# Altium PCB PCB.PcbDoc
Units mil, origin at the board's own origin, x right, y up, seen from the top; angles counter-clockwise.
Board outline 858.27 x 3131.13 mil, 4 copper layers (Top Layer, GND, PWR, Bottom Layer), stack 29.356 mil thick; 71 components, 62 nets, 285 pads, 419 vias.
Unrouted connection lines stored in the file: 44.
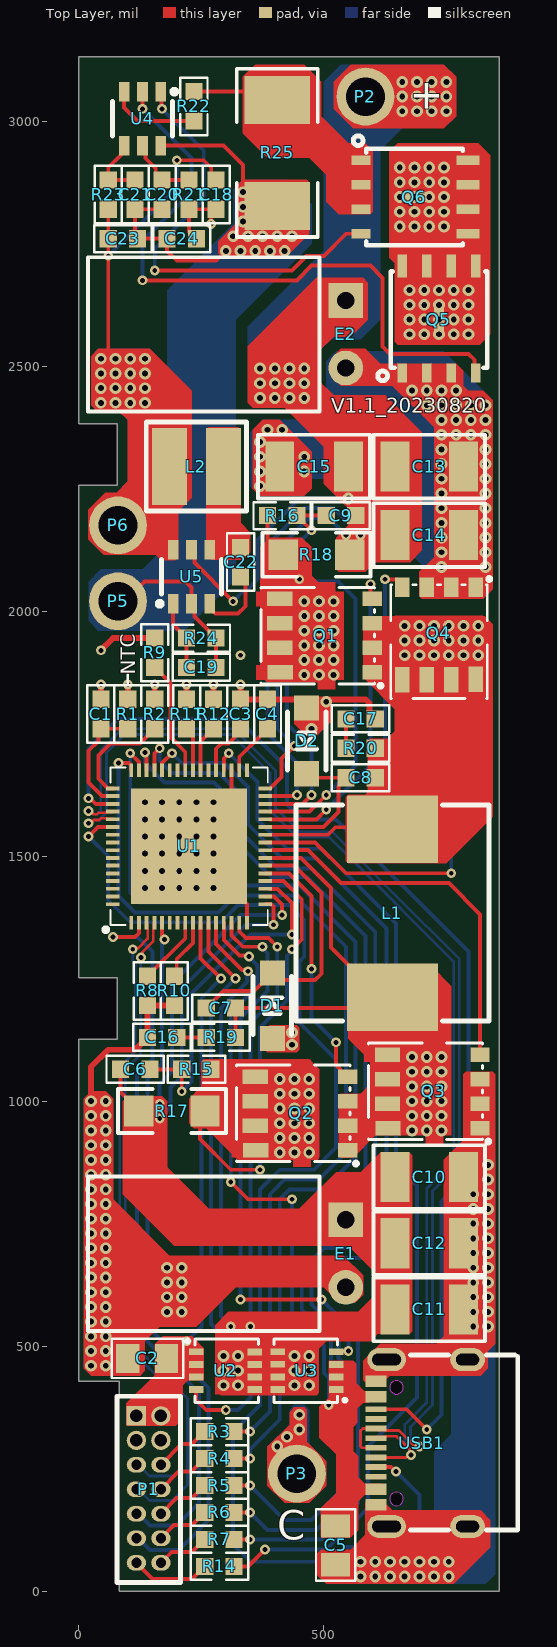
[diagram p0: Top Layer view]
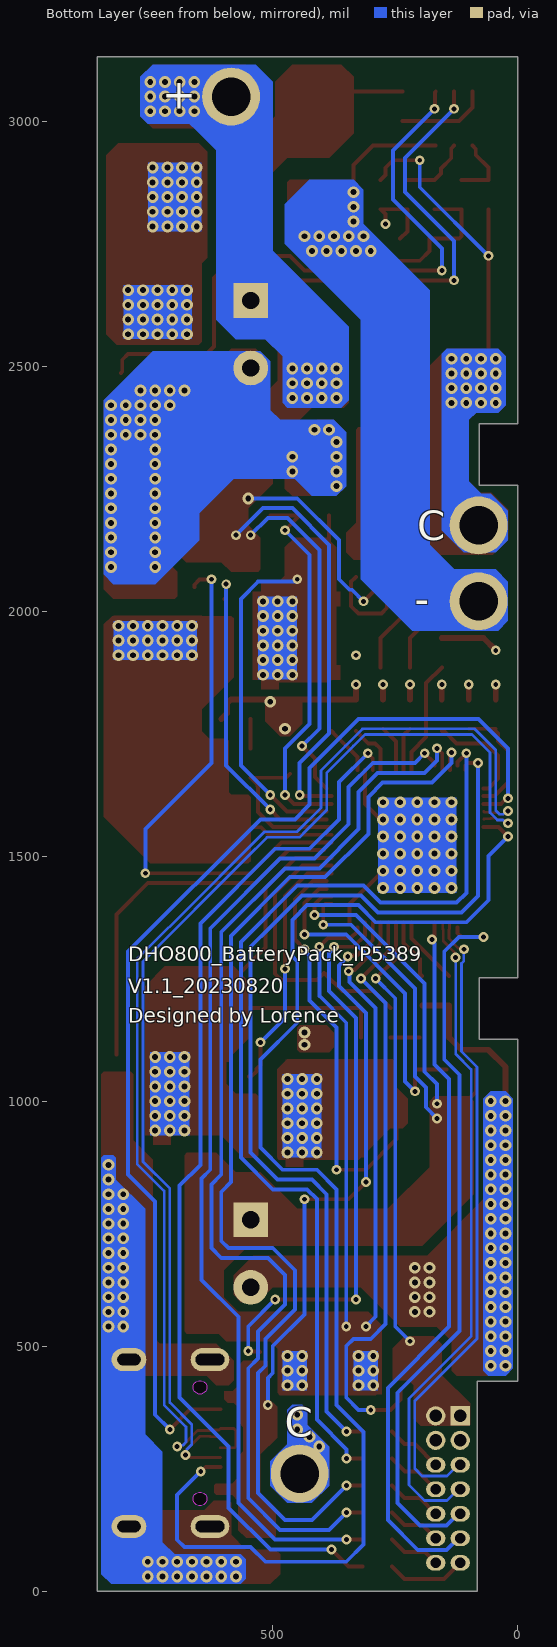
[diagram p1: Bottom Layer view, seen from below]
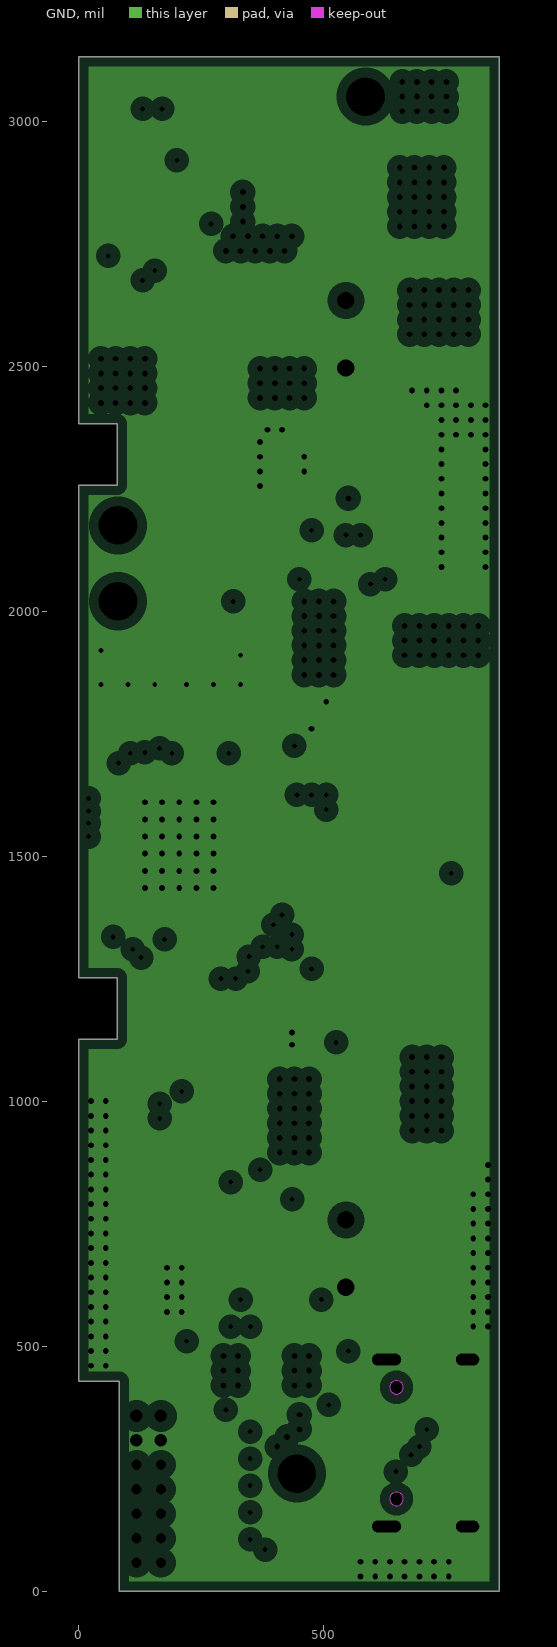
[diagram p2: GND, clearances drawn from the general rule]
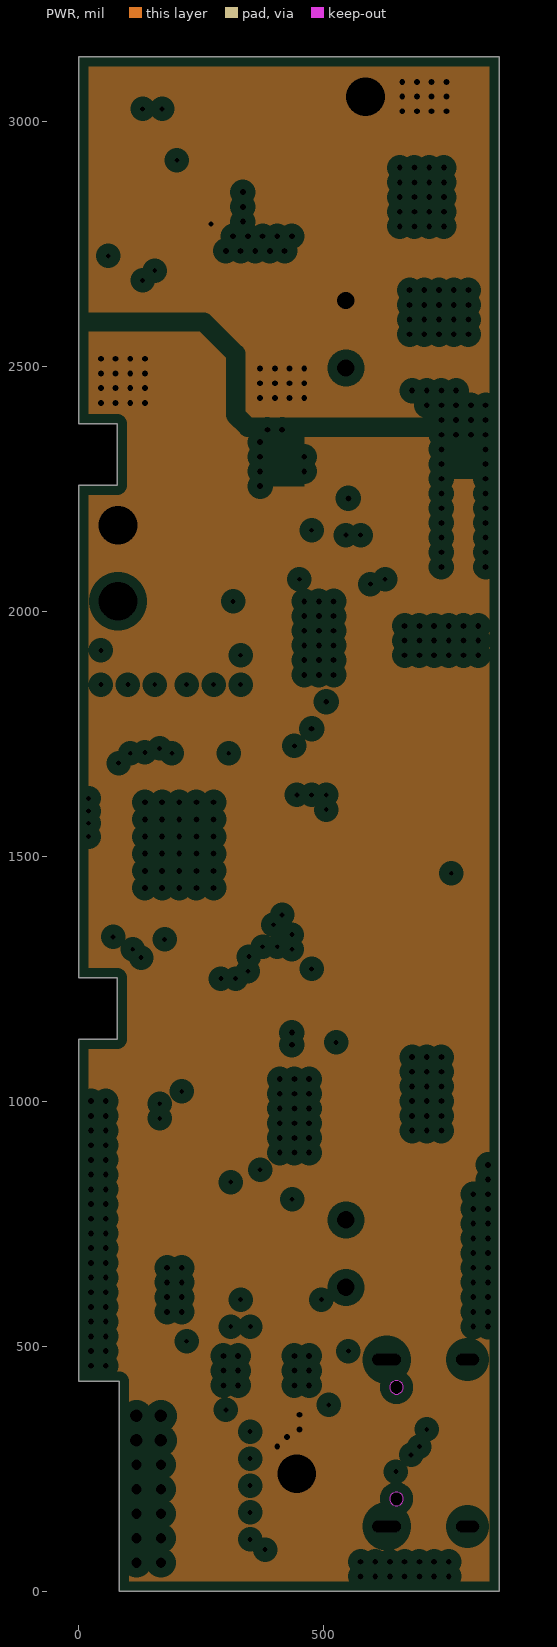
[diagram p3: PWR, clearances drawn from the general rule]

## Layer stack, top to bottom
Top Solder: solder mask 0.4, Solder Resist, Dk 3.5
Top Layer: signal copper 1.4
Dielectric 2: prepreg 2.8, PP-006, Dk 4.1
Dielectric 4: prepreg 2.8, PP-006, Dk 4.1
GND: plane copper 1.378, net GND
Dielectric 1: dielectric 12.6, FR-4, Dk 4.8
PWR: plane copper 1.378, net (Multiple Nets)
Dielectric 5: prepreg 2.8, PP-006, Dk 4.1
Dielectric 3: prepreg 2.8, PP-006, Dk 4.1
Bottom Layer: signal copper 1.4
Bottom Solder: solder mask 0.4, Solder Resist, Dk 3.5

## Board outline
0,428.33 0,1126 78.74,1126 78.74,1251.98 0,1251.98 0,2256.61 78.74,2256.61 78.74,2382.6 0,2382.6 0,3131.13 858.27,3131.13 858.27,0 82.72,0 82.72,428.33

## Design rules (kind name [scope] priority, off if disabled: settings)
Clearance [All] p1: gap=4 ignorepadtopadclearanceinfootprint=FALSE
ComponentClearance [All] p1: gap=0 collisioncheckmode=3 verticalgap=0 showdistances=FALSE
DiffPairsRouting [All] p1: maxlimit=6 minlimit=6 mostfreqgap=6 toplayer_minwidth=5.59 toplayer_maxwidth=5.59 toplayer_prefwidth=5.59 bottomlayer_minwidth=5.59 bottomlayer_maxwidth=5.59 bottomlayer_prefwidth=5.59 maxuncoupledlength=500
HoleSize [All] p1: absolutevalues=TRUE maxlimit=500 minlimit=1 maxpercent=80.000 minpercent=20.000
HoleToHoleClearance [All] p1: gap=0 allowstackedmicrovias=TRUE
MinimumSolderMaskSliver [All] p1: minsoldermaskwidth=0
PlaneClearance [All] p1: clearance=20
PlaneConnect [All] p1: planeconnectstyle=Direct reliefexpansion=20 reliefentries=4 reliefconductorwidth=10 reliefairgap=10
PolygonConnect [All] p1: connectstyle=Relief reliefconductorwidth=10 reliefentries=4 polygonreliefangle="90 Angle" airgapwidth=10
RoutingVias [All] p1: holewidth=10 width=20 viastyle="Through Hole" minholewidth=10 minwidth=20 maxholewidth=500 maxwidth=500
SilkToSilkClearance [All] p1: silktosilkclearance=0
SilkToSolderMaskClearance [IsPad] p1: minsilkscreentomaskgap=0 clearancetoexposedcopper=TRUE
SolderMaskExpansion [All] p1: expansion=4 istentingtop=FALSE
Width [All] p1: maxlimit=500 minlimit=8 preferedwidth=10
21 further rules are at their usual default settings.

## Classes and differential pairs
differential pair CUSB: +CUSB_P -CUSB_N
differential pair BUSB: +BUSB_P -BUSB_N

## Components (designator, comment, footprint, x,y, rotation, side; value= is the part's Value field where it differs from the comment)
C1 "100nF" C_0603 45,1790 r90 top
C2 "10uF" C_0805 140,475 r0 top
C3 "2.2uF" C_0603 330,1790 r90 top
C4 "2.2uF" C_0603 385,1790 r90 top
C5 "10uF" C_0805 524,94 r90 top
C6 "1uF" C_0603 115,1065 r0 top
C7 "100nF" C_0603 290,1190 r180 top
C8 "100nF" C_0603 575,1660 r180 top
C9 "1uF" C_0603 535,2195 r0 top
C10 "22uF" C_1210 715,845 r180 top
C11 "22uF" C_1210 715,575 r180 top
C12 "22uF" C_1210 715,710 r180 top
C13 "22uF" C_1210 715,2295 r180 top
C14 "22uF" C_1210 715,2155 r180 top
C15 "22uF" C_1210 480,2295 r0 top
C16 "2.2nF" C_0603 170,1130 r0 top
C17 "2.2nF" C_0603 575,1780 r180 top
C18 "10uF" C_0603 280,2850 r270 top
C19 "1nF" C_0603 250,1885 r180 top
C20 "100nF" C_0603 170,2850 r90 top
C21 "100nF" C_0603 115,2850 r90 top
C22 "10nF" C_0603 330,2100 r90 top
C23 "10uF" C_0603 90,2760 r180 top
C24 "22uF" C_0603 210,2760 r0 top
D1 "SMF30A" SOD-123FL_L2.6-W1.6-LS3.4-R-FD 395,1195 r90 top
D2 "SMF30A" SOD-123FL_L2.6-W1.6-LS3.4-R-FD 465,1735 r270 top
E1 "220uF/35V/8*12mm" "CAP 3.5*8*12_L" 545,688.9 r270 top locked
E2 "220uF/35V/8*12mm" "CAP 3.5*8*12_L" 545,2565 r270 top locked
L1 "10uH" IND-SMD_L11.0-W10.2 640,1383.74 r90 top locked
L2 "2.2uH" L_4*4 240,2300 r180 top
P1 "X1321WR-2x07J-C40D18" HDR-TH_14P-P1.27-H-M-R2-C7-S1.27-W7.5-N2 142.45,207.85 r270 top locked
P2 "1PIN" 1PIN 585,3050 r0 top locked
P3 "1PIN" 1PIN 445,240 r0 top locked
P5 "1PIN" 1PIN 80,2020 r0 top locked
P6 "1PIN" 1PIN 80,2175 r0 top locked
Q1 "5C670" DFN-5_L6.1-W5.1-P1.27-BL 525,1950 r90 top
Q2 "5C670" DFN-5_L6.1-W5.1-P1.27-BL 475,975 r90 top
Q3 "5C670" DFN-5_L6.1-W5.1-P1.27-BL 745,1020 r90 top
Q4 "5C670" DFN-5_L6.1-W5.1-P1.27-BL 735,1975 r180 top
Q5 "TPH1R403NL" DSOP-8_L5.0-W5.0-P1.27-LS6.0-BL-EP 735,2595 r0 top
Q6 "TPH1R403NL" DSOP-8_L5.0-W5.0-P1.27-LS6.0-BL-EP 685,2845 r270 top locked
R1 "10K" R_0603 100,1790 r90 top
R2 "13K" R_0603 155,1790 r90 top
R3 "100R" R_0603 286.88,325.66 r180 top
R4 "100R" R_0603 286.88,270.66 r180 top
R5 "100R" R_0603 286.88,215.66 r180 top
R6 "100R" R_0603 286.88,160.66 r180 top
R7 "100R" R_0603 286.88,105.66 r180 top
R8 "0R" R_0603 140,1225 r90 top
R9 "27K" R_0603 155,1915 r90 top
R10 "0R" R_0603 195,1225 r90 top
R11 "6.2K" R_0603 220,1790 r90 top
R12 "27K" R_0603 275,1790 r90 top
R14 "10K" R_0603 286.88,50.66 r180 top
R15 "10R" R_0603 240,1065 r180 top
R16 "10R" R_0603 415,2195 r0 top
R17 "0.005R" R_1206 190.07,979.77 r0 top
R18 "0.005R" R_1206 485,2115 r0 top
R19 "2R" R_0603 290,1130 r0 top
R20 "2R" R_0603 575,1720 r0 top
R21 "330R" R_0603 225,2850 r270 top
R22 "2K" R_0603 235,3030 r270 top
R23 "330R" R_0603 60,2850 r270 top
R24 "33K" R_0603 250,1945 r180 top
R25 "0.005R" R_2512 405,2935 r270 top
U1 "IP5389_BZ_AACC" QFN-64_IP5389 225,1520 r0 top locked
U2 "WSD3066DN33" DFN-8_L3.3-W3.3-P0.65-BL 270,450 r270 top locked
U3 "WSD3066DN33" DFN-8_L3.3-W3.3-P0.65-BL 495,450 r90 top
U4 "HY2120-LB" SOT-23-6_L2.9-W1.6-P0.95-LS2.8-BR 130,3005 r90 top locked
U5 "ETA3000S2G" SOT-23-6_L2.9-W1.6-P0.95-LS2.8-BL 230,2070 r0 top
USB1 "TYPE-C 16PIN 2MD(073)" USB-C-SMD_TYPE-C-6PIN-2MD-073 699.88,302.34 r90 top locked

## Footprints (in the part's own frame and the unit in brackets; to place one, negate y for a bottom-side part, rotate by r counter-clockwise, add the part's x,y. Pads: shape width x height; smd on the part's side, far side on the other; paste and mask are expansions set on the pad)
1PIN [mm] "焊点"
  round 3 hole 2 paste+0 mask+0.051: 1(0,0)
C_0603 [mil]
  rect 35x35 smd: 1(-30,0) 2(30,0)
  silkscreen extent -59,-28 59,28
C_0805 [mm]
  rect 1.2x1.5 smd: 1(-1.016,0) 2(0.984,0)
  silkscreen extent -1.85,-1.02 1.85,1.02
C_1210 [mm]
  rect 1.5x2.6 smd: 1(-1.778,0) 2(1.778,0)
  silkscreen extent -2.9,-1.65 2.9,1.65
"CAP 3.5*8*12_L" [mm] "脚距3.5mm直径8mm高度11.5mm"
  rect 1.8x1.8 hole 0.9: 1(-1.75,0)
  round 1.8 hole 0.9: 2(1.75,0)
  silkscreen extent -3.99,-13.37 4.01,-1.37
DFN-5_L6.1-W5.1-P1.27-BL [mm]
  rect 0.75x1 smd: 1(-1.905,-1.875) 2(-0.635,-1.875) 3(0.635,-1.875) 4(1.905,-1.875)
  rect 0.749x1.3 smd paste-100 mask+0.051: 5(1.905,2.921) 6(0.635,2.921) 7(-0.635,2.921) 8(-1.905,2.896)
  Top Layer region: -2.28,-0.39 -2.28,0.035 -2.775,0.035 -2.775,0.94 -2.28,0.94 -2.28,4.14 -1.53,4.14 -1.53,3.64 1.53,3.64 1.53,4.14 2.28,4.14 2.28,0.94 2.775,0.94 2.775,0.035 2.28,0.035 2.28,-0.39 -2.28,-0.39
  silkscreen extent -2.7,-2.4 2.5,3.9
DFN-8_L3.3-W3.3-P0.65-BL [mm]
  rect 0.35x0.75 smd paste+0 mask+0.05: 1(-0.975,-0.78) 2(-0.325,-0.78) 3(0.325,-0.78) 4(0.975,-0.78) 5(0.977,2.272) 6(0.327,2.272) 7(-0.323,2.272) 8(-0.973,2.272)
  Top Layer region: -1.222,0.201 -1.222,2.129 -1.174,2.129 -1.174,2.73 -0.773,2.73 -0.773,2.129 -0.524,2.129 -0.524,2.73 -0.123,2.73 -0.123,2.129 0.126,2.129 0.126,2.73 0.528,2.73 0.528,2.129 0.777,2.129 0.777,2.73 0.777,2.129 0.777,2.73 1.178,2.73 1.178,2.129 1.226,2.129 1.226,0.201 -1.222,0.201
  silkscreen extent -1.65,-1.27 1.65,2.46
DSOP-8_L5.0-W5.0-P1.27-LS6.0-BL-EP [mm]
  rect 0.5x1 smd paste-100 mask+0.05: 1(-1.906,-2.77) 2(-0.636,-2.77) 3(0.634,-2.77) 4(1.904,-2.77)
  rect 0.5x1.2 smd paste-100 mask+0.05: 5(1.906,2.77) 6(0.636,2.77) 7(-0.634,2.77) 8(-1.904,2.77) 9(0,0)
  Top Layer region: -2.125,2.2 2.125,2.2 2.125,-1.3 -2.125,-1.3 -2.125,2.2
  silkscreen extent -3.17,-3.17 2.5,2.5
HDR-TH_14P-P1.27-H-M-R2-C7-S1.27-W7.5-N2 [mm]
  rect 1x1 hole 0.65: 1(-3.81,-0.635)
  round 1 hole 0.65: 2(-3.81,0.635) 3(-2.54,-0.635) 4(-2.54,0.635)
  oval 0.8x1 hole 0.53: 5(-1.27,-0.635) 6(-1.27,0.635) 7(0,-0.635) 8(0,0.635) 9(1.27,-0.635) 10(1.27,0.635) 11(2.54,-0.635) 12(2.54,0.635) 13(3.81,-0.635) 14(3.81,0.635)
  silkscreen extent -4.83,-1.65 4.83,1.65
IND-SMD_L11.0-W10.2 [mm]
  rect 3.5x4.7 smd: 1(-4.35,0) 2(4.35,0)
  silkscreen extent -5.6,-5 5.6,5
L_4*4 [mm]
  rect 1.8x4 smd: 1(-1.4,0.127) 2(1.4,0.127)
  silkscreen extent -2.6,-2.17 2.6,2.43
QFN-64_IP5389 [mm]
  rect 0.2x0.7 smd paste+0 mask+0.051: 1(-3,-3.95) 2(-2.6,-3.95) 3(-2.2,-3.95) 4(-1.8,-3.95) 5(-1.4,-3.95) 6(-1,-3.95) 7(-0.6,-3.95) 8(-0.2,-3.95) 9(0.2,-3.95) 10(0.6,-3.95) 11(1,-3.95) 12(1.4,-3.95) 13(1.8,-3.95) 14(2.2,-3.95) 15(2.6,-3.95) 16(3,-3.95) 33(3,3.95) 34(2.6,3.95) 35(2.2,3.95) 36(1.8,3.95) 37(1.4,3.95) 38(1,3.95) 39(0.6,3.95) 40(0.2,3.95) 41(-0.2,3.95) 42(-0.6,3.95) 43(-1,3.95) 44(-1.4,3.95) 45(-1.8,3.95) 46(-2.2,3.95) 47(-2.6,3.95) 48(-3,3.95)
  rect 0.7x0.2 smd paste+0 mask+0.051: 17(3.95,-3) 18(3.95,-2.6) 19(3.95,-2.2) 20(3.95,-1.8) 21(3.95,-1.4) 22(3.95,-1) 23(3.95,-0.6) 24(3.95,-0.2) 25(3.95,0.2) 26(3.95,0.6) 27(3.95,1) 28(3.95,1.4) 29(3.95,1.8) 30(3.95,2.2) 31(3.95,2.6) 32(3.95,3) 49(-3.95,3) 50(-3.95,2.6) 51(-3.95,2.2) 52(-3.95,1.8) 53(-3.95,1.4) 54(-3.95,1) 55(-3.95,0.6) 56(-3.95,0.2) 57(-3.95,-0.2) 58(-3.95,-0.6) 59(-3.95,-1) 60(-3.95,-1.4) 61(-3.95,-1.8) 62(-3.95,-2.2) 63(-3.95,-2.6) 64(-3.95,-3)
  rect 6x6 smd paste+0 mask+0.051: 65(0,0)
  silkscreen extent -4.39,-4.39 4.08,4.08
R_0603 [mil]
  rect 35x35 smd: 1(-30,0) 2(30,0)
  silkscreen extent -59,-28 59,28
R_1206 [mil]
  rect 60x62.99 smd: 1(-67.5,0) 2(67.5,0)
  silkscreen extent -110,-45 110,45
R_2512 [mm]
  rect 2.5x3.4 smd: 1(-2.75,0) 2(2.75,0)
  silkscreen extent -4.36,-2.1 4.36,2.1
SOD-123FL_L2.6-W1.6-LS3.4-R-FD [mm]
  rect 1.3x1.3 smd paste+0 mask+0.051: 1(1.7,0) 2(-1.7,0)
  silkscreen extent -1.5,-1 1.5,1
SOT-23-6_L2.9-W1.6-P0.95-LS2.8-BL [mm]
  rect 0.55x1 smd paste+0 mask+0.102: 1(-0.95,-1.4) 2(0,-1.4) 3(0.95,-1.4) 4(0.95,1.4) 5(0,1.4) 6(-0.95,1.4)
  silkscreen extent -1.78,-1.52 1.55,0.9
SOT-23-6_L2.9-W1.6-P0.95-LS2.8-BR [mm]
  rect 1x0.55 smd paste+0 mask+0.051: 1(1.4,-0.95) 2(1.4,0) 3(1.4,0.95) 4(-1.4,0.95) 5(-1.4,0) 6(-1.4,-0.95)
  silkscreen extent -0.9,-1.78 1.52,1.55
USB-C-SMD_TYPE-C-6PIN-2MD-073 [mm]
  rect 0.6x1.1 smd paste-100 mask+0.05: 1(-3.2,2.375) 2(-2.4,2.375) 11(2.4,2.375) 12(3.2,2.375)
  rect 0.3x1.1 smd paste-100 mask+0.05: 3(-1.75,2.375) 4(-1.25,2.375) 5(-0.75,2.375) 6(-0.25,2.375) 7(0.25,2.375) 8(0.75,2.375) 9(1.25,2.375) 10(1.75,2.375)
  oval 1.2x1.8 hole 0.6 slot 1.2 at 90 deg paste+0 mask+0.05: 13(-4.325,-2.375) 14(4.325,-2.375)
  oval 1.2x2 hole 0.6 slot 1.5 at 90 deg paste+0 mask+0.05: 13(-4.325,1.825) 14(4.325,1.825)
  Keep-Out Layer board cut-out: 3.24,1.305 3.24,1.375 3.187,1.503 3.088,1.602 2.96,1.655 2.821,1.655 2.692,1.602 2.593,1.503 2.54,1.375 2.54,1.305 2.54,1.235 2.593,1.107 2.692,1.008 2.821,0.955 2.96,0.955 3.088,1.008 3.187,1.107 3.24,1.235 3.24,1.305 3.24,1.305
  Keep-Out Layer board cut-out: -2.54,1.305 -2.54,1.375 -2.593,1.503 -2.692,1.602 -2.82,1.655 -2.96,1.655 -3.088,1.602 -3.187,1.503 -3.24,1.375 -3.24,1.305 -3.24,1.235 -3.187,1.107 -3.088,1.008 -2.96,0.955 -2.82,0.955 -2.692,1.008 -2.593,1.107 -2.54,1.235 -2.54,1.305 -2.54,1.305
  silkscreen extent -4.5,-4.97 4.57,0.6

## Part data
C1 C3 C4 C6 C7 C8 C9 C16 C17 C18 C19 C20 C21 C22 C23 C24: library part C_0603, "贴片电容"
C2 C5: library part C_0805, "贴片电容"
C10 C11 C12 C13 C14 C15: library part C_1210, "贴片电容"
D1 D2: library part SMF30A_C364281, JLCPCB Part Class="Extended Part", Manufacturer="(MDD) Jiangsu Yutai Elec", Contributor=LCSC, Manufacturer Part=SMF30A, spicePre=D, spiceSymbolName=SMF30A_C364281, Supplier=LCSC, Supplier Part=C364281
E1 E2: library part C-CS, "直插固态电容", BOM名称=直插固态电容, 学习资源=www.ooocke.com, 版权归属=源创客
L1: library part 5.6uH, "PSPMAA1040H-100M-ANP", JLCPCB Part Class="Extended Part", Manufacturer=Sunlord, Manufacturer Part=MWSA1206S-5R6MT, Contributor=LCSC, nameAlias=Inductance, spicePre=L, spiceSymbolName=MWSA1206S-5R6MT, Supplier=LCSC, Supplier Part=C408522
L2: JLCPCB Part Class="Extended Part", Manufacturer=EMTEK, Manufacturer Part=PHC0420-2R2M-T, Contributor=LCSC, nameAlias=Inductance, spicePre=L, spiceSymbolName=PHC0420-2R2M-T, Supplier=LCSC, Supplier Part=C251688
P1: "插针", Current Rating (Max)=1A, JLCPCB Part Class="Extended Part", LCSC Part Name="1.27mm 2x7P 弯插 方针", Manufacturer="XKB Connectivity(中国星坤)", Operating Temperature Range=-40℃~+105℃, Voltage Rating (Max)=250V, Welding Temperature (Max)=260℃, Add into BOM=yes, Circluar Pins/Square Pins=方针, Contact Material=黄铜, Contact Plating=金, Convert to PCB=yes, Device=X1321WR-2x07J-C40D18, Insulation Height=1mm, Length of End Connection Pin=-, Length of Mating Pin=4mm, Manufacturer Part=X1321WR-2x07J-C40D18, Mounting Type=弯插, Name=X1321WR-2x07J-C40D18, Number of Pins=14, Number of Rows=2, Pin Structure=2x7P, Pitch=1.27mm, Row Spacing=1.27mm, Supplier=LCSC, Supplier Footprint=插件,P=1.27mm, Supplier Part=C2881827, Symbol=X1321WR-2X07J-C40D18
P2 P3 P5 P6: "焊点", JLCPCB Part Class="Extended Part", Manufacturer=ZHENGLING, Manufacturer Part=Z-211-0311-0021-001, Contributor=LCSC, spicePre=H, spiceSymbolName=Z-211-0311-0021-001, Supplier=LCSC, Supplier Part=C152153
Q1 Q2 Q3 Q4: "NTMFS5C670NLT1G", JLCPCB Part Class="Extended Part", Manufacturer="ON Semicon", Contributor=LCSC, Manufacturer Part=NTMFS5C670NLT1G, spicePre=Q, spiceSymbolName=BSC059N04LS6, Supplier=LCSC, Supplier Part=C179626
Q5 Q6: library part SIRA12DP-T1-GE3, JLCPCB Part Class="Extended Part", Manufacturer="Vishay Intertech", Contributor=LCSC, Manufacturer Part=SIRA12DP-T1-GE3, spicePre=Q, spiceSymbolName=SIRA12DP-T1-GE3, Supplier=LCSC, Supplier Part=C241863
R1 R2 R3 R4 R5 R6 R7 R8 R9 R10 R11 R12 R14 R15 R16 R19 R20 R21 R22 R23 R24: library part R_0603, "贴片电阻"
R17 R18: library part R_1206, "贴片电阻"
R25: library part R_2512, "贴片电阻"
U1: "芯片", Contributor=LoveLoli, spicePre=U, spiceSymbolName=IP5389
U2 U3: "NMOS管", JLCPCB Part Class="Extended Part", Manufacturer="ON Semicon", Manufacturer Part=NTMFS5C670NLT1G, Contributor=LCSC, spicePre=Q, spiceSymbolName=BSC059N04LS6, Supplier=LCSC, Supplier Part=C179626
U4: JLCPCB Part Class="Extended Part", Manufacturer=HYCON, Contributor=LCSC, Manufacturer Part=HY2120-LB, spicePre=U, spiceSymbolName=HY2120-LB, Supplier=LCSC, Supplier Part=C168778
U5: "芯片", LCSC Assembly=Yes, Manufacturer=ETA(钰泰), Contributor=ryq1212, Manufacturer Part=ETA3000S2G, SMT Type=Extend, spicePre=U, spiceSymbolName=ETA3000S2G
USB1: "USB C母座", Current Rating - Power (Max)=5A, JLCPCB Part Class="Extended Part", LCSC Part Name="TYPE-C母座 16P 4脚插件带定位柱 不锈钢外壳 2次模顶", Manufacturer="SHOU HAN(首韩)", Operating Temperature Range=-25℃~+85℃, Add into BOM=yes, Connector Type=Type-C, Convert to PCB=yes, Device="TYPE-C 16PIN 2MD(073)", Gender=母座, Manufacturer Part="TYPE-C 16PIN 2MD(073)", Mounting Style=卧贴, Name="TYPE-C 16PIN 2MD(073)", Number of Contacts=16, Number of Ports=1, Standard=-, Supplier=LCSC, Supplier Footprint=SMD, Supplier Part=C2765186, Symbol="TYPE-C 16PIN 2MD(073)"

## Via types
v1: diameter 24, hole 12, Top Layer to Bottom Layer, tented both sides, 341 vias
v2: diameter 20, hole 10, Top Layer to Bottom Layer, tented both sides, 78 vias

## Nets (pads, with @x,y where several pads share a name; then routed paths per layer and width w, separated by ;. In a path a pad name is that pad's centre, name@x,y a point inside that pad or via, vN(x,y) a via of type N, cw(c..) or ccw(c..) an arc to the next point about the centre after c; other vN are vias at no path point)
BAT+: C9.2 C13.2 C14.2 C15.2 C18.2 C24.2 E2.1 P2.1 R18.2 R21.2 U1.31 U1.32 U5.5 | length 2260.4
  Top Layer w8: U5.5 235.68,2119.44 235.68,2099.32 v2(315,2020) ; C24.2 225,2775 R21.2 C18.2 270,2810 v2(270,2790) ; U1.31 439.11,1622.36 441.75,1625 v2(445,1625) ; U1.32@390.29,1638.17 414,1661.88 414,1699 v2(440,1725) ; v2(545,2155) 545,2158.25 553,2166.25 553,2183 C9.2
  Bottom Layer w8: v2(315,2020) 338.65,2043.65 343.65,2043.65 365,2065 365,2145 450,2230 v1(550,2230) ; v2(440,1725) 405,1760 405,2125 470,2190 510,2190 v2(545,2155) ; v2(445,1625) 445,1690 385,1750 385,2135 460,2210 520,2210 v2(575,2155)
  other v1: 370,2435 400,2435 430,2435 460,2435 370,2465 400,2465 430,2465 460,2465 370,2495 400,2495 430,2495 460,2495 660,3020 690,3020 720,3020 750,3020 660,3050 690,3050 720,3050 750,3050 660,3080 690,3080 720,3080 750,3080
BAT-: C19.1 C20.1 C21.1 C23.1 C24.1 P5.1 R24.1 R25.2 U4.6 U5.2 | length 933
  Top Layer w8: P5.1 93.86,2020 133.86,2060 218,2060 230,2048 U5.2 235.8,2009.08 235.8,1989.2 R24.1 C19.1 ; U4.6 295.12,2949.88 335,2910 v1(335,2855) ; C20.1 C21.1 115,2765 C23.1 C24.1 180,2735 200,2715 280,2715 v1(300,2735)
  other v1: 330,2735 360,2735 390,2735 420,2735 315,2765 345,2765 375,2765 405,2765 435,2765 335,2795 335,2825
BATC: C18.1 C23.2 L2.2 P3.1 P6.1 R23.2 U5.6 | length 1075.9
  Top Layer w8: R23.2 C23.2 v2(60,2725) 60,2471.72 75,2456.72 v1(75,2455) v1(105,2425) 108.06,2421.94 108.06,2415.13 184.88,2338.31 L2.2 ; U5.6 192.6,2262.72 L2.2@194.88,2265 ; v2(200,2920) 255,2920 270.19,2904.81 270.19,2889.81 C18.1
  Bottom Layer w8: v2(60,2725) 200,2865 v2(200,2920)
  other v1: 405,295 425,315 450,330 450,360 45,2425 75,2425 135,2425 45,2455 105,2455 135,2455 45,2485 75,2485 105,2485 135,2485 45,2515 75,2515 105,2515 135,2515
BUSB_N: P1.7 U1.4 | length 1351.7
  Top Layer w5.59: v2(126.97,1293.03) 129.73,1295.79 129.73,1304.56 152.06,1326.89 152.06,1350.28 152.99,1351.22 152.99,1363.35 U1.4
  Bottom Layer w5.59: P1.7 121.39,207.85 144.24,185 190,185 221.78,216.78 221.78,393.22 95,520 95,1065 126.59,1096.59 126.59,1292.65 v2(126.97,1293.03)
BUSB_P: P1.5 U1.3 | length 1309.1
  Top Layer w5.59: v2(110,1310) 112.76,1312.76 121.53,1312.76 140.47,1331.69 140.47,1350.28 139.53,1351.22 139.53,1363.35 U1.3
  Bottom Layer w5.59: v2(110,1310) 110,1286.25 115,1281.25 115,1101.39 83.41,1069.8 83.41,515.2 210.19,388.42 210.19,250.19 195,235 144.24,235 121.39,257.85 P1.5
CC1: U1.54 USB1.4 | length 2704.3
  Top Layer w8: v2(20,1540) 39.37,1559.37 U1.54 ; USB1.4 606.44,253.07 636.77,253.07 645.84,244 v2(647,244)
  Bottom Layer w8: v2(20,1540) 60,1500 60,1410 105,1365 290,1365 325,1400 430,1400 460,1370 460,1295 450,1285 450,1160 525,1085 525,905 480,860 410,860 370,820 370,380 315,325 315,95 350,60 515,60 545,90 680,90 695,105 695,196 v2(647,244)
CC2: U1.51 USB1.10 | length 2327.7
  Top Layer w8: v2(20,1618) 23.25,1618 34.63,1606.61 U1.51 ; USB1.10 668.75,371.25 v2(710,330)
  Bottom Layer w8: v2(20,1618) 20,1720 80,1780 325,1780 425,1680 425,1605 455,1575 525,1575 795,1305 795,850 740,795 740,360 v2(710,330)
CC3: P1.9 U1.2 | length 1506.9
  Top Layer w8: v2(70,1335) 115,1335 122.57,1342.57 U1.2@122.57,1354.71
  Bottom Layer w8: v2(70,1335) 120,1335 150,1305 150,1085 118.79,1053.79 118.79,531.21 245,405 245,180 199.11,134.11 145.13,134.11 121.39,157.85 P1.9
CC4: P1.11 U1.5 | length 1470.5
  Top Layer w8: U1.5 169.88,1338.37 175,1333.25 v2(175,1330)
  Bottom Layer w8: P1.11 121.39,107.85 145.13,84.11 204.11,84.11 265,145 265,415 140,540 140,1045 170,1075 170,1321.75 175,1326.75 v2(175,1330)
CUSB_N: U1.53 USB1.5 USB1.7 | length 2405.1
  Top Layer w5.59: v2(20,1567) 23.77,1567 30.48,1573.7 41.6,1573.7 45.09,1577.2 55.28,1577.2 56.22,1576.26 68.35,1576.26 U1.53 ; USB1.5 668.92,272.82 674.13,278.03 v2(678.03,278.03) 675.27,280.79 675.27,289.56 648.6,316.23 628.5,316.23 627.57,315.3 609.48,315.3 USB1.7
  Bottom Layer w5.59: v2(20,1567) 23.77,1567 30.48,1573.7 41.6,1573.7 56.59,1588.7 56.59,1711.59 93.41,1748.41 311.59,1748.41 335,1725 390,1670 390,1593.61 431.8,1551.8 445.2,1538.41 511.59,1538.41 555,1495 765,1285 765,876.39 710,821.39 710,385 665.23,340.23 665.23,299.6 675.27,289.56 675.27,280.79 v2(678.03,278.03)
CUSB_P: U1.52 USB1.6 USB1.8 | length 2448
  Top Layer w5.59: v2(20,1592) 23.77,1592 30.48,1585.3 36.8,1585.3 40.29,1588.79 55.28,1588.79 56.22,1589.72 68.35,1589.72 U1.52 ; USB1.6 578.27,292.5 575,295.77 575,327.34 579.53,331.87 USB1.8 609.48,328.76 627.57,328.76 628.5,327.82 653.4,327.82 683.47,297.76 692.24,297.76 v2(695,295)
  Bottom Layer w5.59: v2(20,1592) 23.77,1592 30.48,1585.3 36.8,1585.3 45,1593.5 45,1716.39 88.61,1760 316.39,1760 319.79,1756.61 351.39,1725 401.59,1674.8 401.59,1598.41 450,1550 516.39,1550 571.39,1495 646.59,1419.8 776.59,1289.8 776.59,871.59 721.59,816.59 721.59,380.2 676.82,335.43 676.82,304.4 683.47,297.76 692.24,297.76 v2(695,295)
GND: C1.2 C2.1 C3.2 C4.2 C5.1 C10.1 C11.1 C12.1 C13.1 C14.1 C15.1 C16.1 C17.1 D1.2 D2.2 E1.2 E2.2 P1.3 P1.4 Q3.1 Q3.2 Q3.3 Q4.1 Q4.2 Q4.3 Q5.1 Q5.2 Q5.3 R1.2 R2.2 R8.1 R9.2 R10.1 R11.2 R12.2 U1.16 U1.35 U1.65 USB1.1 USB1.12 USB1.13 USB1.14 | length 1344.3
  Top Layer w8: U1.35 311.61,1606.61 U1.65 v1(240,1505) v1(275,1470) 343.11,1401.89 U1.16
  Top Layer w12: v1(25,1000) 25,1070 60,1105 115,1105 C16.1 R8.1 R10.1 ; C1.2 v2(45,1850) ; v2(45,1920) 70,1945 R9.2 ; R1.2 v2(100,1850) ; R2.2 v2(155,1850) ; R11.2 v2(220,1850) ; R12.2 v2(275,1850) ; v2(330,1850) C3.2 C4.2 446.93,1820 D2.2 483.07,1820 585,1820 593.5,1811.5 593.5,1791.5 C17.1
  other v1: 575,30 605,30 635,30 665,30 695,30 725,30 755,30 575,60 605,60 635,60 665,60 695,60 725,60 755,60 25,460 55,460 25,490 55,490 25,520 55,520 805,540 835,540 25,550 55,550 180,570 210,570 805,570 835,570 25,580 55,580 180,600 210,600 805,600 835,600 25,610 55,610 180,630 210,630 805,630 835,630 25,640 55,640 180,660 210,660 805,660 835,660 25,670 55,670 805,690 835,690 25,700 55,700 805,720 835,720 25,730 55,730 805,750 835,750 25,760 55,760 805,780 835,780 25,790 55,790 805,810 835,810 25,820 55,820 835,840 25,850 55,850 835,870 25,880 55,880 25,910 55,910 25,940 55,940 25,970 55,970 55,1000 435,1115 435,1140 135,1435 170,1435 205,1435 240,1435 275,1435 135,1470 170,1470 205,1470 240,1470 135,1505 170,1505 205,1505 275,1505 135,1540 170,1540 205,1540 240,1540 275,1540 135,1575 170,1575 205,1575 240,1575 275,1575 135,1610 170,1610 205,1610 240,1610 275,1610 475,1760 505,1815 740,2090 830,2090 740,2120 830,2120 740,2150 830,2150 740,2180 830,2180 740,2210 830,2210 740,2240 830,2240 370,2255 740,2270 830,2270 370,2285 460,2285 740,2300 830,2300 370,2315 460,2315 740,2330 830,2330 370,2345 740,2360 770,2360 800,2360 830,2360 385,2370 415,2370 740,2390 770,2390 800,2390 830,2390 710,2420 740,2420 770,2420 800,2420 830,2420 680,2450 710,2450 740,2450 770,2450
  other v2: 330,1910
KEY: P1.13 R14.2 | length 167.6
  Top Layer w8: P1.13 150.3,25 231.22,25 R14.2
  Bottom Layer w8: P1.13 P1.13@121.39,57.85
LED1: P1.6 R3.2 | length 117.5
  Top Layer w8: P1.6 209.59,300 231.22,300 R3.2
LED2: P1.8 R4.2 | length 115.5
  Top Layer w8: P1.8 203.62,244.03 230.25,244.03 R4.2
LED3: P1.10 R5.2 | length 113.3
  Top Layer w8: P1.10 199.59,190 231.22,190 R5.2
LED4: P1.12 R6.2 | length 111.3
  Top Layer w8: P1.12 194.59,135 231.22,135 R6.2
LED5: P1.14 R7.2 | length 109.2
  Top Layer w8: P1.14 189.59,80 231.22,80 R7.2
LG1: Q3.4 U1.24 | length 764.2
  Top Layer w8: 395,1512.13 467.87,1512.13 535,1445 755,1445 818.82,1381.18 Q3.4
LG2: Q4.4 U1.25 | length 1105.4
  Top Layer w8: U1.25 380.57,1527.94 482.06,1527.94 545,1465 v2(760,1465) ; v2(625,2065) 625.49,2064.5 649.24,2064.5 660,2053.74 Q4.4
  Bottom Layer w8: v2@625,2064.31 625,1690 760,1555 v2(760,1465)
NetC1_1: C1.1 R1.1 U1.50 | length 231.3
  Top Layer w8: C1.1@45,1755 40.19,1750.19 40.19,1735.19 20,1715 20,1650 47.64,1622.36 U1.50 ; C1.1 R1.1
NetC3_1: C3.1 U1.37 | length 108.4
  Top Layer w8: U1.37 280.12,1719.12 291.06,1730.06 305.06,1730.06 C3.1@330,1755
NetC4_1: C4.1 U1.34 | length 106.3
  Top Layer w8: U1.34 327.36,1702.36 371.5,1746.5 380,1755 C4.1@385,1755
NetC6_2: C6.2 R15.2 U1.19 | length 693.8
  Top Layer w8: C6.2 R15.2 v2(210,1020) ; U1.19@390.29,1433.32 405.68,1433.32 435,1404 v2(435,1340)
  Bottom Layer w8: v2(210,1020) 230,1040 230,1220 350,1340 v2(435,1340)
NetC7_1: C7.1 L1.1 Q2.1 Q2.2 Q2.3 Q3.5 Q3.6 Q3.7 Q3.8 R19.2 U1.23 | length 820.3
  Top Layer w8: R19.2 C7.1 600.42,1190 L1.1@622.9,1212.48 ; U1.23 453.62,1496.38 515,1435 515,1313.86 616.38,1212.48 L1.1@622.9,1212.48 ; L1.1 628.69,1212.48 L1.1@622.9,1212.48
  other v1: 680,940 710,940 740,940 680,970 710,970 740,970 680,1000 710,1000 740,1000 680,1030 710,1030 740,1030 680,1060 710,1060 740,1060 680,1090 710,1090 740,1090
NetC7_2: C7.2 D1.1 U1.22 | length 575.6
  Top Layer w8: C7.2 295,1225 358.07,1225 391.93,1258.86 D1.1@391.93,1260 ; U1.22 439.37,1480.63 495,1425 495,1260 482.1,1247.1 409.83,1247.1 D1.1
NetC8_1: C8.1 L1.2 Q1.1 Q1.2 Q1.3 Q4.5 Q4.6 Q4.7 Q4.8 R20.2 U1.26 | length 283.6
  Top Layer w8: U1.26 508.62,1543.62 524,1559 L1.2@597.26,1559 ; L1.2@597.26,1557.74 L1.2@640,1515
  other v1: 665,1910 695,1910 725,1910 755,1910 785,1910 815,1910 665,1940 695,1940 725,1940 755,1940 785,1940 815,1940 665,1970 695,1970 725,1970 755,1970 785,1970 815,1970
NetC8_2: C8.2 D2.1 U1.27 | length 321.7
  Top Layer w8: U1.27 499.37,1559.37 530,1590 530,1641.81 531.5,1643.31 531.5,1646.5 C8.2 473.07,1660 D2.1
NetC9_1: C9.1 R16.2 U1.30 | length 786
  Top Layer w8: U1.30 456.61,1606.61 v2(475,1625) ; v2(475,2165) R16.2 C9.1
  Bottom Layer w8: v2(475,1625) 475,1720 425,1770 425,2115 v2(475,2165)
NetC16_2: C16.2 R19.1 | length 60
  Top Layer w8: C16.2 R19.1
NetC17_2: C17.2 R20.1 | length 60
  Top Layer w8: R20.1 C17.2
NetC19_2: C19.2 R24.2 U5.1 | length 141.2
  Top Layer w8: U5.1 192.6,1972.4 R24.2 C19.2
NetC20_2: C20.2 R21.1 U4.5 | length 141.4
  Top Layer w8: U4.5 135.8,2944.07 135.8,2924.2 157.01,2902.99 157.01,2892.99 C20.2 R21.1
NetC21_2: C21.2 R23.1 U4.4 | length 138.4
  Top Layer w8: U4.4 85.77,2943.05 85.77,2930.77 60,2905 R23.1 C21.2
NetC22_1: C22.1 U5.3 | length 156.4
  Top Layer w8: U5.3 267.4,2006.02 278.43,1995 325,1995 340,2010 340,2060 C22.1
NetC22_2: C22.2 L2.1 U5.4 | length 64.6
  Top Layer w8: U5.4 325.12,2125.12 C22.2
NetQ1_4: Q1.4 U1.28 | length 651.8
  Top Layer w8: U1.28@390.29,1575.12 485.12,1575.12 v2(505,1595) ; v2(595,2055) 595,2028.82 Q1.4
  Bottom Layer w8: v2(505,1595) 595,1685 v2(595,2055)
NetQ1_5: Q1.5 Q1.6 Q1.7 Q1.8 R16.1 R18.1 U1.29 | length 845.1
  Top Layer w8: R16.1 385,2144 417.5,2111.5 R18.1@417.5,2110 ; U1.29@390.29,1590.87 470.87,1590.87 v2(505,1625) ; R18.1 443.5,2089 443.5,2074.75 450,2068.25 v2(450,2065)
  Bottom Layer w8: v2@450,2060 530,2060 565,2025 565,1685 v2(505,1625)
  other v1: 460,1870 490,1870 520,1870 460,1900 490,1900 520,1900 460,1930 490,1930 520,1930 460,1960 490,1960 520,1960 460,1990 490,1990 520,1990 460,2020 490,2020 520,2020
NetQ2_4: Q2.4 U1.21 | length 515.8
  Top Layer w8: U1.21 428.87,1464.88 475,1418.75 v2(475,1270) ; v2(525,1120) 525,1073.82 533.14,1065.68 533.14,1060.76 543.9,1050 Q2.4
  Bottom Layer w8: v2(475,1270) 475,1170 v2(525,1120)
NetQ2_5: Q2.5 Q2.6 Q2.7 Q2.8 R15.1 R17.2 U1.20 | length 877.2
  Top Layer w8: R17.2 247.37,969.57 247.37,922.63 310,860 v2(370,860) ; U1.20@390.29,1449.13 417.87,1449.13 455,1412 455,1330 v2(435,1310)
  Bottom Layer w8: v2(370,860) 370,1150 425,1205 425,1296.75 435,1306.75 v2(435,1310)
  other v1: 410,895 440,895 470,895 410,925 440,925 470,925 410,955 440,955 470,955 410,985 440,985 470,985 410,1015 440,1015 470,1015 410,1045 440,1045 470,1045
NetQ5_5: Q5.5 Q5.6 Q5.7 Q5.8 Q5.9 Q6.5 Q6.6 Q6.7 Q6.8 Q6.9
  other v1: 675,2565 705,2565 735,2565 765,2565 795,2565 675,2595 705,2595 735,2595 765,2595 795,2595 675,2625 705,2625 735,2625 765,2625 795,2625 675,2655 705,2655 735,2655 765,2655 795,2655 655,2785 685,2785 715,2785 745,2785 655,2815 685,2815 715,2815 745,2815 655,2845 685,2845 715,2845 745,2845 655,2875 685,2875 715,2875 745,2875 655,2905 685,2905 715,2905 745,2905
NetQ6_1: Q6.1 Q6.2 Q6.3 R22.1 R25.1 | length 176.9
  Top Layer w8: R22.1 388.27,3060 R25.1
NetR2_1: R2.1 U1.49 | length 220.5
  Top Layer w8: U1.49 59.77,1638.11 40,1657.88 40,1705 65,1730 125,1730 150,1755 R2.1@155,1755
NetR3_1: R3.1 U1.48 | length 1988.6
  Top Layer w8: v2(81,1690) 102.2,1690 106.89,1685.31 U1.48 ; R3.1 v2(349.34,325.66)
  Bottom Layer w8: v2(81,1690) 81,1419 115,1385 285,1385 320,1420 440,1420 505,1355 545,1315 545,895 490,840 420,840 390,810 390,366.32 v2(349.34,325.66)
NetR4_1: R4.1 U1.47 | length 2064.5
  Top Layer w8: v2(105,1710) 122.57,1692.42 U1.47@122.57,1685.29 ; R4.1 v2(349.34,270.66)
  Bottom Layer w8: v2(105,1710) 105,1425 125,1405 280,1405 315,1440 450,1440 565,1325 565,885 500,820 430,820 410,800 410,350 349.34,289.34 v2(349.34,270.66)
NetR5_1: R5.1 U1.46 | length 2256.7
  Top Layer w8: v2(135,1711.75) 138.39,1708.37 U1.46 ; R5.1 v2(349.34,215.66)
  Bottom Layer w8: v2(135,1711.75) 135,1690 175,1650 276,1650 305,1621 305,1545 393,1457 465.31,1457 585,1337.31 585,835 605,815 605,715 590,700 500,700 455,655 455,575 515,515 515,460 530,445 530,200 475,145 420,145 v2(349.34,215.66)
NetR6_1: R6.1 U1.45 | length 2290.4
  Top Layer w8: U1.45 154.13,1709.13 v2(165,1720) ; R6.1 v2(349.34,160.66)
  Bottom Layer w8: v2(165,1720) 165,1695 190,1670 286,1670 325,1631 325,1555 405,1475 475,1475 605,1345 605,850 625,830 625,700 605,680 510,680 475,645 475,585 530,530 530,475 550,455 550,190 485,125 385,125 v2(349.34,160.66)
NetR7_1: R7.1 U1.44 | length 2157.8
  Top Layer w8: U1.44@169.94,1685.29 169.94,1689.94 v2(190,1710) ; R7.1 v2(349.34,105.66)
  Bottom Layer w8: v2(190,1710) 210,1690 296,1690 345,1641 345,1565 415,1495 485,1495 627.57,1352.43 627.57,860 645,842.57 645,635 570,560 570,180 495.66,105.66 v2(349.34,105.66)
NetR8_2: R8.2 U1.8 | length 141.4
  Top Layer w8: R8.2 217.13,1332.13 U1.8
NetR9_1: R9.1 U1.41 | length 235.2
  Top Layer w8: R9.1 187,1853 187,1743 217.13,1712.87 U1.41
NetR10_2: R10.2 U1.9 | length 125.2
  Top Layer w8: R10.2 199.81,1259.81 199.81,1289.81 232.87,1322.87 U1.9
NetR11_1: R11.1 U1.40 | length 89.8
  Top Layer w8: R11.1 232.87,1747.13 U1.40
NetR12_1: R12.1 U1.39 | length 95.4
  Top Layer w8: U1.39 248.62,1733.62 R12.1
NetR14_1: R14.1 U1.36 | length 2142.7
  Top Layer w8: U1.36 295.93,1675.57 295.93,1699.31 306,1709.38 v2(306,1710) ; R14.1 345.66,50.66 v2(380,85)
  Bottom Layer w8: v2(306,1710) 365,1651 365,1575 425,1515 495,1515 647.57,1362.43 647.57,870 690,827.57 690,395 590,295 590,170 505,85 v2(380,85)
NetR22_2: R22.2 U4.3 | length 186.5
  Top Layer w8: U4.3 92.6,3027.4 120,3000 R22.2
OC: Q5.4 U4.2 | length 1347.2
  Top Layer w8: v2(130,2675) 445,2675 475,2705 595,2705 620,2680 620,2540 635,2525 795,2525 807.05,2512.95 807.05,2488.87 Q5.4 ; v2(130,3025) U4.2
  Bottom Layer w8: v2(130,2675) 130,2755 230,2855 230,2925 v2(130,3025)
OD: Q6.4 U4.1 | length 894.9
  Top Layer w8: v2(155,2695) 435,2695 465,2725 500,2725 545.02,2770.02 Q6.4 ; U4.1 168.7,3058.82 168.7,3026.3 v2(170,3025)
  Bottom Layer w8: v2(155,2695) 155,2740 255,2840 255,2940 v2(170,3025)
VBUS: C5.2 U1.13 U3.1 U3.2 U3.3 USB1.2 USB1.11 | length 1262.9
  Top Layer w8: U1.13 295.87,1329.13 327.7,1297.3 344.7,1297.3 v2(347,1295) ; v2(310,835) 345.23,799.77 v2(435.23,799.77) ; v2(510,380) 525.69,395.69 U3.1 ; U3.2 533.56,437.2 547.77,451.41 551.72,451.41 559.69,459.37
  Bottom Layer w8: v2(310,835) 310,1180 365,1235 365,1277 v2(347,1295) ; v2(435.23,799.77) 435,799.54 435,565 500,500 500,445 510,435 v2(510,380)
VBUS_I: C6.1 C10.2 C11.2 C12.2 E1.1 R17.1 U1.12 U1.15 U1.17 U1.18 U2.5 U2.6 U2.7 U2.8 U3.5 U3.6 U3.7 U3.8 | length 3144.7
  Top Layer w8: C6.1 85,1019 122.5,981.5 R17.1@122.5,980 ; R17.1 137.57,994.77 v2(165.07,994.77) v2(165.07,964.77) ; U1.12 280.12,1320.34 333.16,1267.3 342.7,1267.3 v2(345,1265) ; U1.15@327.43,1354.71 327.43,1346.57 341,1333 387,1333 v2(405,1315) ; U1.17 392.31,1401.89 397,1397.2 v2(397,1360) ; U1.18 398.36,1417.64 415,1401 v2(415,1380)
  Bottom Layer w8: v2@165,965 187.5,987.5 187.5,1027.5 210,1050 210,1230 340,1360 v2(397,1360) ; v2@165,995 165,1035 190,1060 190,1240 330,1380 v2(415,1380) ; v2(310,540) 290,560 290,1190 343,1243 343,1263 v2(345,1265) ; v2(350,540) 350,1160 405,1215 v2(405,1315)
  other v1: 295,420 325,420 440,420 470,420 295,450 325,450 440,450 470,450 295,480 325,480 440,480 470,480
VBUSG: U1.14 U3.4 | length 1163.9
  Top Layer w8: U1.14 311.68,1364.43 311.68,1338.32 335,1315 v2(375,1315) ; v2(330,595) v2(495,595) ; U3.4 526.5,489.19 549.19,489.19 v2(550,490)
  Bottom Layer w8: v2(330,595) 330,1170 385,1225 385,1301.75 375,1311.75 v2(375,1315) ; v2(495,595) 550,540 v2(550,490)
VIN: C2.2 P1.1 P1.2 U1.10 U2.1 U2.2 U2.3 | length 934.8
  Top Layer w8: v2(220,510) 222.3,507.7 222.3,497.52 231.44,488.39 U2.1 ; U1.10 248.62,1291.38 v2(290,1250)
  Bottom Layer w8: v2(220,510) 250,540 250,1210 v2(290,1250)
VING: U1.11 U2.4 | length 1217.4
  Top Layer w8: U2.4 239.31,390.69 260,370 v2(300,370) ; U1.11 264.37,1305.63 v2(320,1250)
  Bottom Layer w8: v2(300,370) 325,370 350,395 350,500 335,515 300,515 270,545 270,1200 v2(320,1250)
pads on no net: U1.1 U1.6 U1.7 U1.33 U1.38 U1.42 U1.43 U1.55 U1.56 U1.57 U1.58 U1.59 U1.60 U1.61 U1.62 U1.63 U1.64 USB1.3 USB1.9

## Polygon pours and split planes (outlines as drawn)
GND on GND (split plane): 838.17,20.1 102.82,20.1 102.82,428.33 102.43,432.25 101.29,436.02 99.43,439.49 96.93,442.54 93.89,445.04 90.41,446.89 86.64,448.04 82.72,448.42 20.1,448.42 20.1,1105.9 78.74,1105.9 82.66,1106.29 86.43,1107.43 89.91,1109.29 92.95,1111.79 95.45,1114.83 97.31,1118.31 98.45,1122.08 98.84,1126 98.84,1251.98 98.45,1255.9 97.31,1259.67 95.45,1263.15 92.95,1266.19 89.91,1268.69 86.43,1270.55 82.66,1271.69 78.74,1272.08 20.1,1272.08 20.1,2236.52 78.74,2236.52 82.66,2236.9 86.43,2238.05 89.91,2239.9 92.95,2242.4 95.45,2245.45 97.31,2248.92 98.45,2252.69 98.84,2256.61 98.84,2382.6 98.45,2386.52 97.31,2390.29 95.45,2393.76 92.95,2396.81 89.91,2399.31 86.43,2401.16 82.66,2402.31 78.74,2402.69 20.1,2402.69 20.1,3111.04 838.17,3111.04
BAT+ on PWR (split plane): 838.17,2394.78 353.19,2394.78 339.78,2408.19 339.78,2525 339.4,2528.86 338.27,2532.57 336.45,2535.99 333.99,2538.99 268.99,2603.99 265.99,2606.45 262.57,2608.27 258.86,2609.4 255,2609.78 20.1,2609.78 20.1,3111.04 838.17,3111.04
BATC on PWR (split plane): 300.22,2516.81 300.22,2400 300.6,2396.14 301.73,2392.43 303.55,2389.01 306.01,2386.01 331.01,2361.01 334.01,2358.55 337.43,2356.73 341.14,2355.6 345,2355.22 375,2355.22 375,2255 460,2255 460,2355.22 740,2355.22 740,2270 830,2270 830,2355.22 838.17,2355.22 838.17,20.1 102.82,20.1 102.82,428.33 102.43,432.25 101.29,436.02 99.43,439.49 96.93,442.54 93.89,445.04 90.41,446.89 86.64,448.04 82.72,448.42 20.1,448.42 20.1,1105.9 78.74,1105.9 82.66,1106.29 86.43,1107.43 89.91,1109.29 92.95,1111.79 95.45,1114.83 97.31,1118.31 98.45,1122.08 98.84,1126 98.84,1251.98 98.45,1255.9 97.31,1259.67 95.45,1263.15 92.95,1266.19 89.91,1268.69 86.43,1270.55 82.66,1271.69 78.74,1272.08 20.1,1272.08 20.1,2236.52 78.74,2236.52 82.66,2236.9 86.43,2238.05 89.91,2239.9 92.95,2242.4 95.45,2245.45 97.31,2248.92 98.45,2252.69 98.84,2256.61 98.84,2382.6 98.45,2386.52 97.31,2390.29 95.45,2393.76 92.95,2396.81 89.91,2399.31 86.43,2401.16 82.66,2402.31 78.74,2402.69 20.1,2402.69 20.1,2570.22 246.81,2570.22

## Other copper
Top Layer:
  region net NetC22_2: 325,2375 330,2370 330,2180 350,2160 350,2120 335,2105 270,2105 260,2115 260,2370 265,2375
  region net GND: 695,2030 700,2025 825,2025 845,2045 845,2400 845,2430 825,2450 795,2450 785,2460 785,2490 770,2505 615,2505 585,2535 535,2535 515,2515 515,2480 535,2460 640,2460 725,2375 725,2110 695,2080
  region net BAT+: 745,3115 770,3090 770,3010 745,2985 560,2985 520,3025 520,3080 555,3115
  region net BATC: 19,2147 51,2115 157,2115 168,2104 197,2104 203,2110 203,2204 230,2231 230,2450 145,2535 40,2535 25,2520 25,2420 40,2405 85,2405 100,2390 100,2265 77,2242 54,2242 19,2207
  region net NetQ5_5: 651.34,2543.82 818.66,2543.82 840,2565.16 840,2930 815,2955 651.14,2955 633.82,2937.68 633.82,2721.18 645,2710 645,2550.16
  region net BAT-: 465,2880 470,2875 470,2770 420,2720 295,2720 285,2730 285,2755 320,2790 320,2865 335,2880
  region net NetQ6_1: 595,2810 600,2815 600,2940 585,2955 550,2955 495,3010 495,3080 460,3115 360,3115 335,3090 335,2975 385,2925 470,2925 505,2890 505,2835 530,2810
  region net BAT+: 345,2540 345,2425 355,2415 420,2415 500,2335 500,2260 550,2210 550,2175 525,2150 525,2085 530,2080 585,2080 605,2100 676.26,2100 700,2123.74 700,2365 625,2440 520,2440 490,2470 490,2530 520,2560 555,2560 590,2595 590,2670 580,2680 485,2680
  region net GND: 565,590 580,605 580,645 540,685 185,685 70,800 70,1005 55,1020 25,1020 10,1005 10,455 25,440 125,440 135,450 135,510 165,540 240,540 320,620 500,620 530,590
  region net GND: 785,920 745,880 745,520 725,500 725,490 742.38,472.62 817.62,472.62 850,505 850,1055 845,1060 790,1060 785,1055
  region net VBUS_I: 485.2,400 490,404.8 490,495 505,510 595.2,510 610.2,525 675,525 680,530 680,890 675,895 615,895 575,855 525,855 450,780 265,780 180,865 180,1000 170,1010 100,1010 90,1000 90,810 195,705 550,705 600,655 600,600 570,570 305,570 277.93,542.93 277.93,412.07 290,400
  region net NetC7_1: 720,1275 760.35,1234.65 760.35,938.6 751.75,930 605,930 560,885 535,885 530,890 530,1010 535,1015 575,1015 595,1035 595,1082.01 550,1127.01 550,1245 580,1275
  region net BATC: 430,365 430,340 385,295 385,215 420,180 470,180 505,215 505,265 465,305 465,370 460,375 440,375
  region net GND: 445,1825 510,1825 515,1820 515,1775 485,1745 465,1745 440,1770 440,1820
  region net GND: 370,2235 355,2250 355,2370 375,2390 410,2390 475,2325 475,2250 460,2235
  region net NetC8_1: 590,1735 595,1740 630,1740 645,1755 645,1800 580,1865 580,1985 585,1990 827.88,1990 845,1972.88 845,1695 845,1580 750,1485 550,1485 545,1490 545,1620 550,1625 585,1625 590,1630
  region net GND: 390,1155 445,1155 450,1150 450,1105 445,1100 385,1100 375,1110 375,1140
  region net GND: 615,420 635,440 820,440 835,455 835,490 820,505 615,505 580,470 580,430 590,420
  region net GND: 620,185 640,165 820,165 840,145 840,90 765,15 505,15 485,35 485,75 495,85 555,85 585,115 585,165 585,180 590,185
  region net NetQ1_5: 385,1855 515,1855 535,1875 535,2012.24 475,2072.24 475,2130 455,2150 390,2150 370,2130 370,1870
  region net NetQ2_5: 225,1005 250,1030 250,1080 255,1085 470.12,1085 490.35,1064.76 490,1064.41 490,882.12 487.88,880 324.74,880 259.74,945 235,945 225,955
  region net VBUS: 568.5,373.5 568.5,343.5 559.69,334.69 559.69,285.31 570,275 570,232 583,219 616,219 619,216 619,201 615,197 583,197 570,184 570,124.7 554.3,109 497,109 494,112 494,169 525,200 525,279 491,313 491,376 510,395 510,469 511,470 559.69,470 566,463.69 566,424 582,408 599,408 599,392 592,385 580,385
  region net VIN: 99,338 198,338 212,352 212,420 222,430 254,430 255,431 255,496 231,520 171,520 155,504 155,441 97,383 97,340
Bottom Layer:
  region net NetQ5_5: 805,2555 805,2665 665,2665 665,2555
  rectangle net NetQ5_5: 645,2775 755,2915
  rectangle net VBUS_I: 430,410 480,490
  rectangle net VBUS_I: 285,410 335,490
  region net NetC8_1: 825,1900 825,1980 655,1980 655,1900
  rectangle net NetQ1_5: 450,1860 530,2030
  rectangle net NetC7_1: 670,930 750,1100
  rectangle net NetQ2_5: 400,885 480,1055
  rectangle net GND: 125,1425 285,1620
  region net BATC: 145,2535 155,2525 155,2165 110,2120 45,2120 20,2145 20,2205 55,2240 75,2240 100,2265 100,2390 85,2405 40,2405 25,2420 25,2520 40,2535
  region net BAT-: 315,2860 315,2790 180,2655 180,2135 130,2085 45,2085 20,2060 20,1980 40,1960 215,1960 320,2065 320,2595 475,2750 475,2830 425,2880 335,2880
  region net GND: 25,1020 55,1020 70,1005 70,450 60,440 25,440 10,455 10,1005
  region net GND: 845,890 850,885 850,35 830,15 565,15 555,25 555,65 565,75 700,75 725,100 725,285 760,320 760,780 820,840 820,885 825,890
  region net GND: 370,2235 420,2235 455,2270 580,2270 650,2200 650,2145 740,2055 825,2055 845,2075 845,2430 745,2530 525,2530 505,2510 505,2410 485,2390 375,2390 350,2365 350,2255
  region net BATC: 385,215 420,180 470,180 505,215 505,265 470,300 470,370 460,380 440,380 430,370 430,340 385,295
  region net BAT+: 745,3115 770,3090 770,3010 755,2995 670,2995 655,2980 615,2940 615,2595 575,2555 515,2555 480,2520 480,2425 470,2415 360,2415 345,2430 345,2580 500,2735 500,3080 535,3115
GND (plane layer: these items are gaps in the copper):
  rectangle: 117.45,57.85 167.44,257.85
PWR (plane layer: these items are gaps in the copper):
  rectangle: 117.45,57.85 167.44,357.85
  rectangle: 375,2255 460,2360
  rectangle: 740,2270 830,2360
  lines w39.37: 0,2590 255,2590 320,2525 320,2400 345,2375 860,2375

## Silkscreen, mask and mechanical layers (free items; w line width, h text height)
Top Overlay:
  lines w5: 100,1848.5 100,1870
  text "+" at 675,3025 h60
  text "V1.1_20230820" at 515,2405 h30
  text "NTC" at 115,1870 h30 r90
  text "C" at 405,105 h60
Bottom Overlay:
  text "+" at 725,3025 h60
  text "C" at 205,2145 h60
  text "-" at 210,1995 h60
  text "DHO800_BatteryPack_IP5389" at 795,1285 h30
  text "V1.1_20230820" at 795,1220 h30
  text "Designed by Lorence" at 795,1160 h30
  text "C" at 475,315 h60
Bottom Solder:
  rectangle: 645,2775 755,2915
  region: 805,2555 805,2665 665,2665 665,2555
  region: 825,1900 825,1980 655,1980 655,1900
  rectangle: 450,1860 530,2030
  rectangle: 125,1425 285,1620
  rectangle: 670,930 750,1100
  rectangle: 400,885 480,1055
  rectangle: 430,410 480,490
  rectangle: 285,410 335,490
Mechanical 1:
  lines w0.5: 0,428.33 82.72,428.33 82.72,382.19 82.72,33.52 82.72,0 779.52,0 858.27,0 858.27,78.74 858.27,127.85 858.27,479.82 858.27,3052.38 858.27,3131.13 779.53,3131.13 0,3131.13 0,2382.6 78.74,2382.6 78.74,2256.61 0,2256.61 0,1909.45 0,1862.2 0,1830.71 0,1783.46 0,1251.98 78.74,1251.98 78.74,1126 0,1126 0,428.33
Mechanical 2:
  lines w0.5: -4328.12,-6029.91 -4328.12,-5995.66 ; 4.65,32.85 14.27,32.85 109.57,32.85 ; 75.52,49.98 75.52,40.73 83.39,32.85 ; 75.52,65.73 75.52,99.98 ; 75.52,115.73 75.52,149.98 ; 75.52,215.73 75.52,249.98 ; 75.52,265.73 75.52,299.98 ; 75.52,315.73 75.52,349.98 ; 75.52,365.73 75.52,374.98 83.39,382.85 175.33,382.85 ; 109.57,49.99 109.57,32.85 ; 175.32,365.73 151.7,365.73 4.65,365.73 4.65,349.98 151.7,349.98 175.32,349.98 175.32,357.85 175.32,382.85 ; 201.5,382.85 209.37,374.98 ; 209.39,49.98 235.42,49.98 ; 209.37,430.08 209.37,365.73 209.37,40.73 201.5,32.85 109.57,32.85 ; 256.6,382.85 175.32,382.85 ; 779.53,0 779.53,78.74 858.27,78.74 ; 779.53,3131.13 779.53,3052.39 858.27,3052.39 ; 4.65,49.98 151.7,49.98 175.32,49.98 175.32,65.73 151.7,65.73 4.65,65.73 4.65,49.98 ; 4.65,99.98 151.7,99.98 175.32,99.98 175.32,115.73 151.7,115.73 4.65,115.73 4.65,99.98 ; 4.65,149.98 151.7,149.98 175.32,149.98 175.32,165.73 151.7,165.73 4.65,165.73 4.65,149.98 ; 4.65,199.98 151.7,199.98 175.32,199.98 175.32,215.73 151.7,215.73 4.65,215.73 4.65,199.98 ; 4.65,249.98 151.7,249.98 175.32,249.98 175.32,265.73 151.7,265.73 4.65,265.73 4.65,249.98 ; 4.65,299.98 151.7,299.98 175.32,299.98 175.32,315.73 151.7,315.73 4.65,315.73 4.65,299.98 ; 618.54,127.85 907.91,127.85 907.91,179.03 907.91,428.63 907.91,479.82 618.54,479.82 618.54,428.63 618.54,179.03 618.54,127.85
Mechanical 3:
  lines w0.5: 75.52,49.98 75.52,65.73 ; 75.52,99.98 75.52,115.73 ; 75.52,149.98 75.52,165.73 ; 75.52,199.98 75.52,215.73 ; 75.52,249.98 75.52,265.73 ; 75.52,299.98 75.52,315.73 ; 75.52,349.98 75.52,365.73 ; 109.57,49.99 109.57,57.85 ; 109.57,99.98 109.57,115.73 ; 109.57,149.98 109.57,165.73 ; 109.57,199.98 109.57,215.73 ; 109.57,249.98 109.57,265.73 ; 109.57,299.98 109.57,315.73 ; 109.57,349.98 109.57,357.85 117.45,357.85 ; 125.32,49.98 125.32,65.73 ; 125.32,99.98 125.32,115.73 ; 125.32,149.98 125.32,165.73 ; 125.32,199.98 125.32,215.73 ; 125.32,249.98 125.32,265.73 ; 125.32,299.98 125.32,315.73 ; 125.32,349.98 125.32,365.73 ; 159.57,49.98 159.57,65.73 ; 159.57,99.98 159.57,115.73 ; 159.57,149.98 159.57,165.73 ; 159.57,199.98 159.57,215.73 ; 159.57,249.98 159.57,265.73 ; 159.57,299.98 159.57,315.73 ; 159.57,349.98 159.57,365.73 ; 175.32,49.98 209.39,49.98 ; 779.53,3052.4 779.53,3000.04 858.27,3000.04 ; 779.53,3078.78 858.27,3078.78 ; 109.57,57.85 109.57,65.73 109.57,57.85 ; 858.27,3052.38 858.27,3052.4